# Altium PCB PekeeCarte2.PcbDoc
Units mil, origin at the board's own origin, x right, y up, seen from the top; angles counter-clockwise.
Board outline 3650.03 x 2360.03 mil, 2 copper layers (Top Layer, Bottom Layer); 6 components, 11 nets, 53 pads, 0 vias.
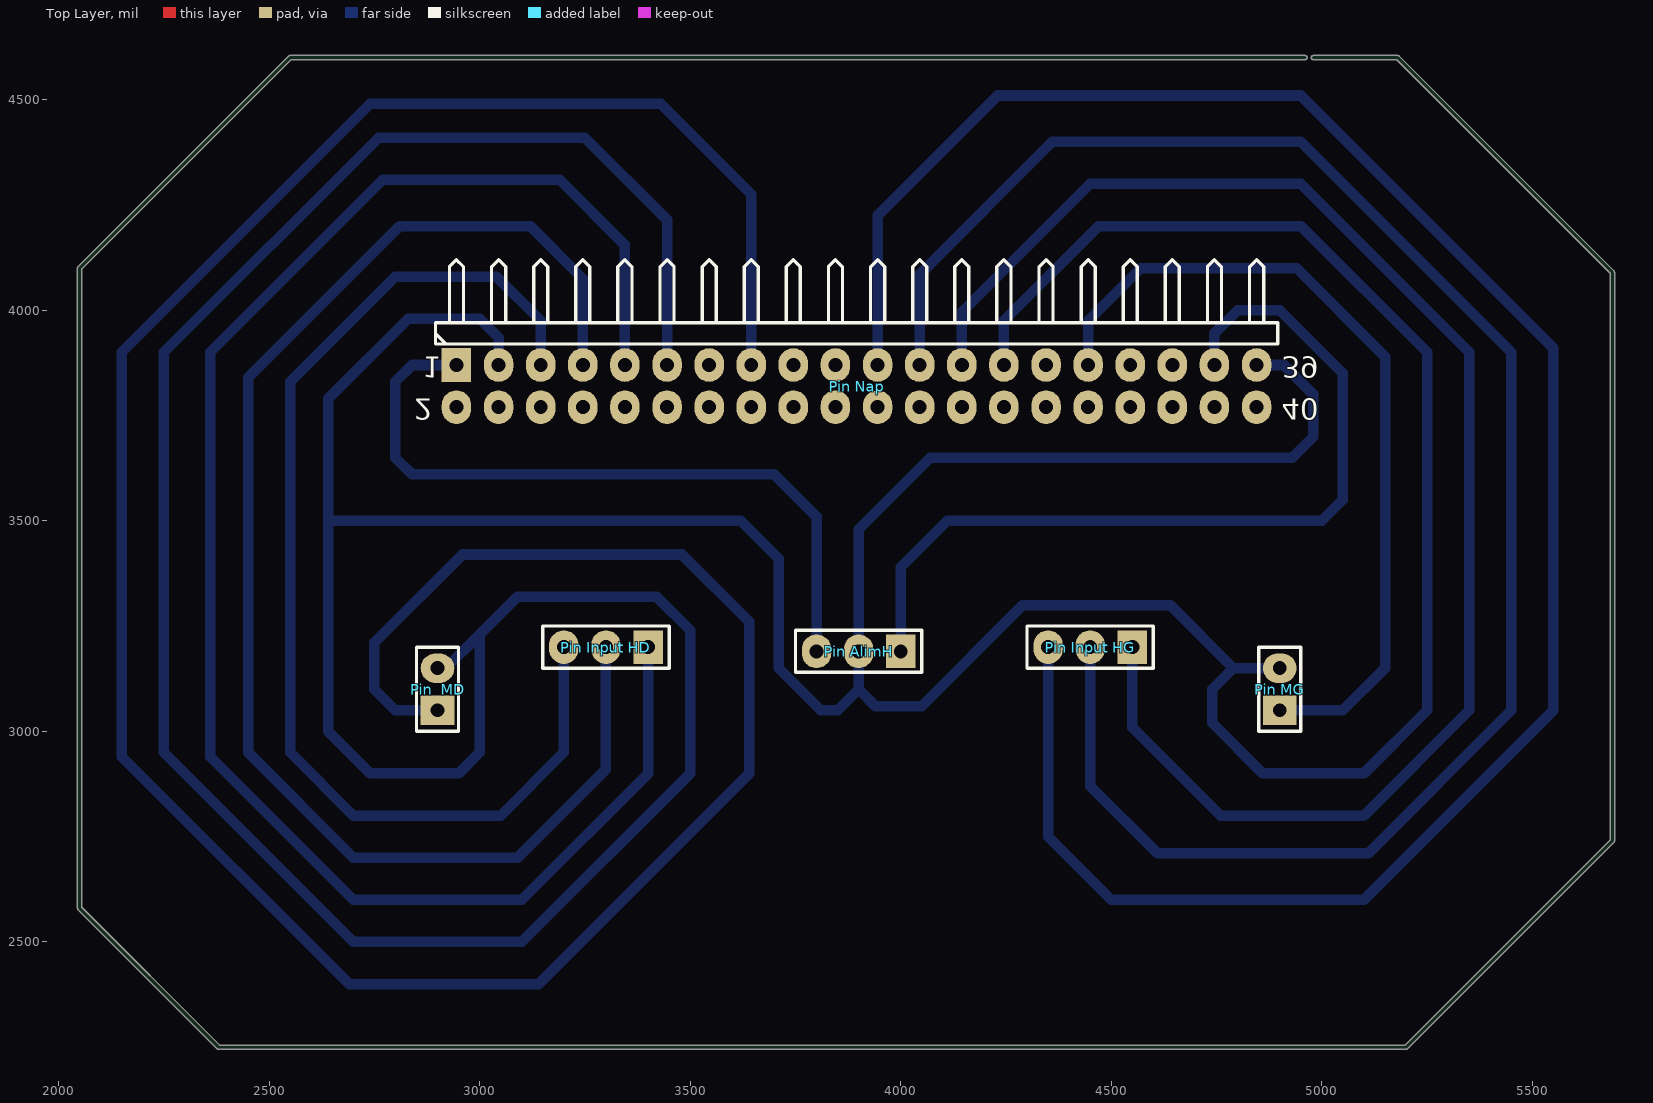
[diagram p0: Top Layer view]
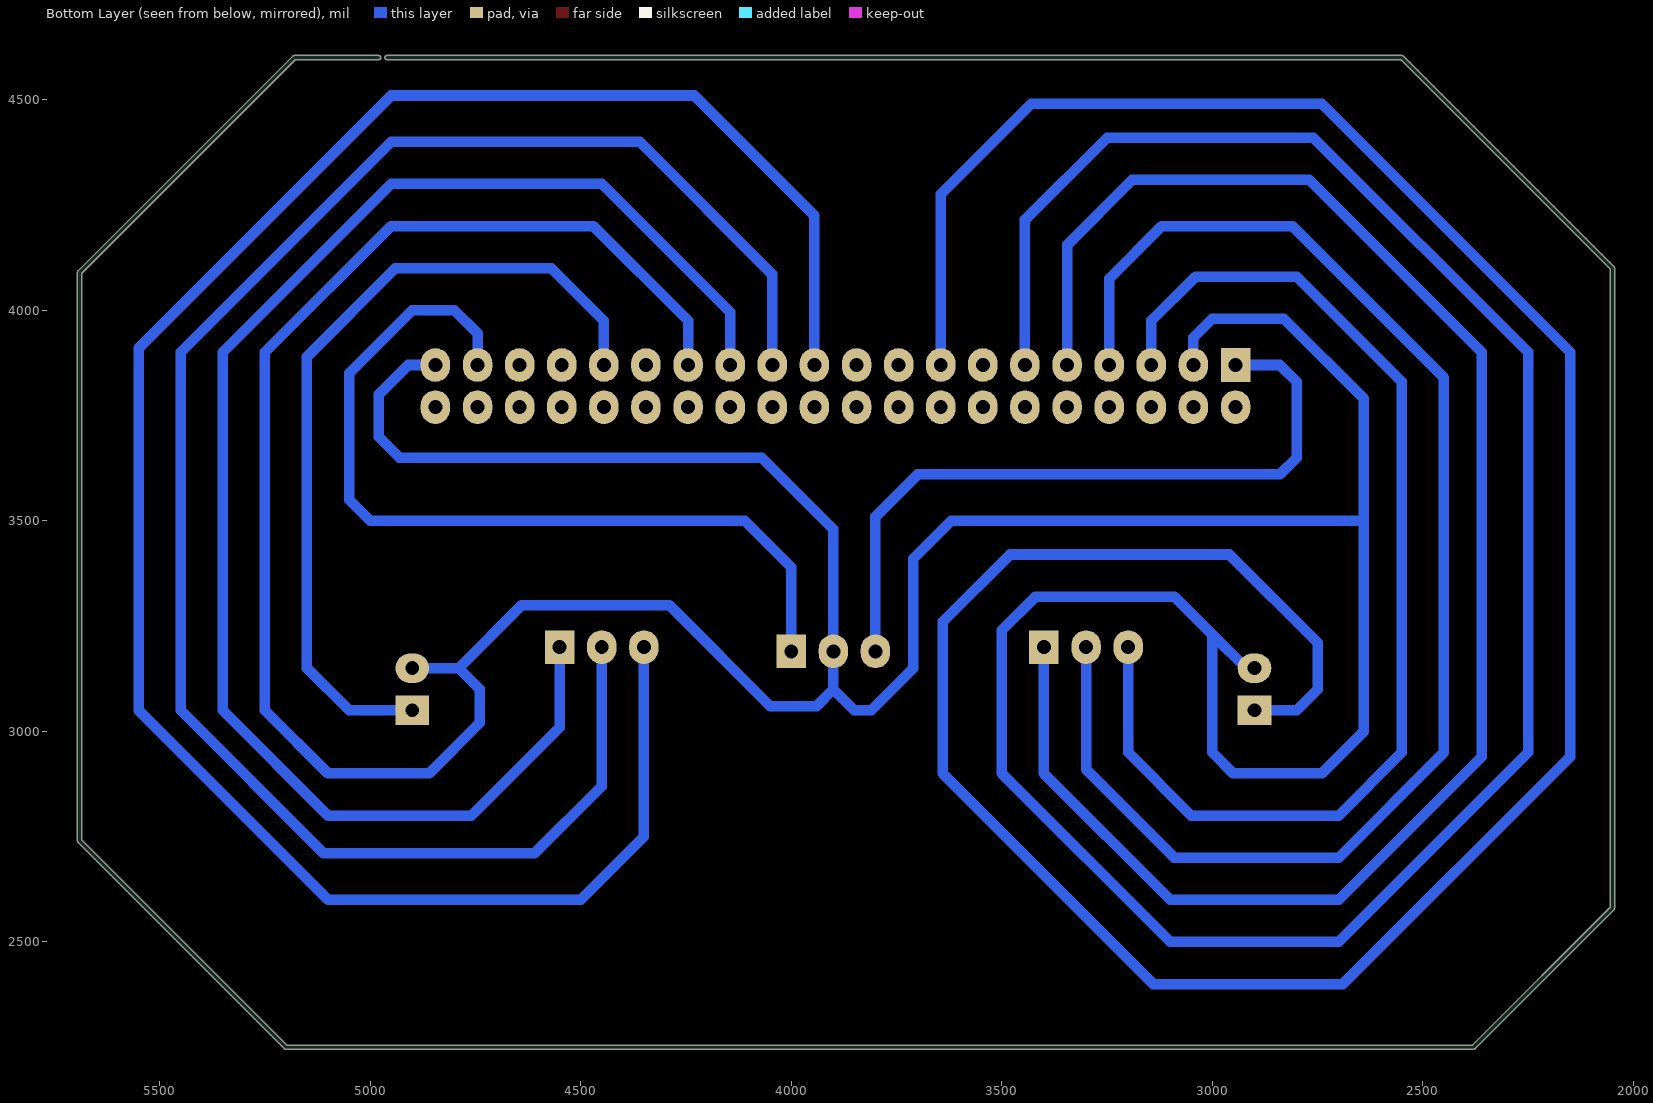
[diagram p1: Bottom Layer view, seen from below]

## Layer stack, top to bottom
Top Solder: solder mask 0.4, Solder Resist, Dk 3.5
Top Layer: signal copper 1.4
Dielectric 1: dielectric 12.6, FR-4, Dk 4.8
Bottom Layer: signal copper 1.4
Bottom Solder: solder mask 0.4, Solder Resist, Dk 3.5

## Board outline
2376.45,2246.45 2046.45,2576.45 2046.47,2576.44 cw(c2050,2580) 2044.98,2580 2044.98,4100 cw(c2050,4100) 2046.47,4103.56 2046.45,4103.55 2546.45,4603.55 2546.44,4603.53 cw(c2550,4600) 2550,4605.02 4960,4605.02 cw(c4960,4600) 4965.02,4600 cw(c4960,4600) 4960,4594.98 2552.08,4594.98 2055.01,4097.92 2055.01,2582.08 2382.08,2255.01 5197.92,2255.01 5684.98,2742.08 5684.98,4087.92 5177.92,4594.98 4980,4594.98 cw(c4980,4600) 4980,4605.02 5180,4605.02 cw(c5180,4600) 5183.56,4603.53 5183.55,4603.55 5693.55,4093.55 5693.53,4093.56 cw(c5690,4090) 5695.02,4090 5695.02,2740 cw(c5690,2740) 5693.53,2736.44 5693.55,2736.45 5203.55,2246.45 5203.56,2246.47 cw(c5200,2250) 5200,2244.99 2380,2244.99 cw(c2380,2250)

## Design rules (kind name [scope] priority, off if disabled: settings)
AssemblyTestPointUsage [All] p1 off:
AssemblyTestpoint [All] p1 off: testpointundercomponent=TRUE minsize=40 maxsize=100 preferedsize=60 minholesize=0 maxholesize=40 preferedholesize=32 testpointgrid=1 usegrid=TRUE gridtolerance=0.01 allowsidetop=TRUE allowsidebottom=TRUE
Clearance [All] p1 off: gap=10
ComponentClearance [All] p1 off: gap=10 collisioncheckmode=3 verticalgap=10 showdistances=FALSE
DiffPairsRouting [All] p1 off: maxlimit=10 minlimit=10 mostfreqgap=10 toplayer_minwidth=15 toplayer_maxwidth=15 toplayer_prefwidth=15 bottomlayer_minwidth=15 bottomlayer_maxwidth=15 bottomlayer_prefwidth=15 maxuncoupledlength=500
FabricationTestPointUsage [All] p1 off: valid=0 allowmultiple=FALSE
FabricationTestpoint [All] p1 off: side=3 testpointundercomponent=TRUE minsize=40 maxsize=100 preferedsize=60 minholesize=0 maxholesize=40 preferedholesize=32 testpointgrid=1 allowsidetop=TRUE allowsidebottom=TRUE usegrid=TRUE gridtolerance=0.01
FanoutControl Fanout_BGA [IsBGA] p1 off: bgadir=Out bgaviamode=Centered fanoutstyle=Auto fanoutdirection=Alternating viagrid=1 // Fanout_BGA (Default Rule)
FanoutControl Fanout_LCC [IsLCC] p2 off: bgadir=Out bgaviamode=Centered fanoutstyle=Auto fanoutdirection=Alternating viagrid=1 // Fanout_LCC (Default Rule)
FanoutControl Fanout_SOIC [IsSOIC] p3 off: bgadir=Out bgaviamode=Centered fanoutstyle=Auto fanoutdirection=Alternating viagrid=1 // Fanout_SOIC (Default Rule)
FanoutControl Fanout_Small [(CompPinCount < 5)] p4 off: bgadir=Out bgaviamode=Centered fanoutstyle=Auto fanoutdirection=OutThenIn viagrid=1 // Fanout_Small (Default Rule)
FanoutControl Fanout_Default [All] p5 off: bgadir=Out bgaviamode=Centered fanoutstyle=Auto fanoutdirection=Alternating viagrid=1 // Fanout_Default (Default Rule)
Height [All] p1 off: minheight=0 maxheight=1000 prefheight=500
HoleSize [All] p1 off: absolutevalues=TRUE maxlimit=100 minlimit=1 maxpercent=80.000 minpercent=20.000
HoleToHoleClearance [All] p1 off: gap=10 allowstackedmicrovias=TRUE
LayerPairs [All] p1 off: enforce=TRUE
MinimumSolderMaskSliver [All] p1 off: minsoldermaskwidth=10
NetAntennae [All] p1 off: netantennaetolerance=0
PasteMaskExpansion [All] p1 off: expansion=0
PlaneClearance [All] p1 off: clearance=20
PlaneConnect [All] p1 off: planeconnectstyle=Relief reliefexpansion=20 reliefentries=4 reliefconductorwidth=10 reliefairgap=10
PolygonConnect [All] p1 off: connectstyle=Relief reliefconductorwidth=10 reliefentries=4 polygonreliefangle="90 Angle" airgapwidth=10
RoomDefinition PekeeCarte2 [InComponentClass('PekeeCarte2')] p1: confinementstyle=ConfineIn formatcopy=TRUE lockcomponents=FALSE outline 0,0 2000,0 2000,1000 0,1000
RoutingCorners [All] p1 off: cornerstyle=45-Degree minsetback=100 maxsetback=100
RoutingLayers [All] p1 off: top layer_v5=TRUE bottom layer_v5=TRUE
RoutingPriority [All] p1 off: routingpriority=0
RoutingTopology [All] p1 off: topology=Shortest
RoutingVias [All] p1 off: holewidth=28 width=50 viastyle="Through Hole" minholewidth=28 minwidth=50 maxholewidth=28 maxwidth=50
ShortCircuit [All] p1 off: allowed=FALSE
SilkToBoardRegionClearance [All] p1 off:
SilkToSilkClearance [All] p1 off: silktosilkclearance=10
SilkToSolderMaskClearance [IsPad] p1 off: minsilkscreentomaskgap=10 clearancetoexposedcopper=TRUE
SolderMaskExpansion [All] p1 off: expansion=4
UnRoutedNet [All] p1 off:
Width [All] p1 off: maxlimit=25 minlimit=10 preferedwidth=25 toplayer_maxwidth=10 toplayer_prefwidth=10 minimp=50.000000 maximp=50.000000 favimp=50.000000

## Components (designator, comment, footprint, x,y, rotation, side; value= is the part's Value field where it differs from the comment)
"Pin  MD" "Header 2" HDR1X2 2900,3050 r90 top
"Pin AlimH" "Header 3" HDR1X3 4000,3190 r180 top
"Pin Input HD" "Header 3" HDR1X3 3400,3200 r180 top
"Pin Input HG" "Header 3" HDR1X3 4550,3200 r180 top
"Pin MG" "Header 2" HDR1X2 4900,3050 r90 top
"Pin Nap" "Header 20X2H" HDR2X20H 2945,3870 r0 top

## Footprints (in the part's own frame and the unit in brackets; to place one, negate y for a bottom-side part, rotate by r counter-clockwise, add the part's x,y. Pads: shape width x height; smd on the part's side, far side on the other; paste and mask are expansions set on the pad)
HDR1X2 [mil] "Connector; Header; 2 Position"
  rect 70x80 hole 33: 1(0,0)
  oval 70x80 hole 33: 2(100,0)
  silkscreen extent -50,-50 150,50
HDR1X3 [mil] "Connector; Header; 3 Position"
  rect 70x80 hole 33: 1(0,0)
  oval 70x80 hole 33: 2(100,0) 3(200,0)
  silkscreen extent -50,-50 250,50
HDR2X20H [mil] "Connector; Header; 20x2 Position; Right Angle"
  rect 70x80 hole 33: 1(0,0)
  oval 70x80 hole 33: 2(0,-100) 3(100,0) 4(100,-100) 5(200,0) 6(200,-100) 7(300,0) 8(300,-100) 9(400,0) 10(400,-100) 11(500,0) 12(500,-100) 13(600,0) 14(600,-100) 15(700,0) 16(700,-100) 17(800,0) 18(800,-100) 19(900,0) 20(900,-100) 21(1000,0) 22(1000,-100) 23(1100,0) 24(1100,-100) 25(1200,0) 26(1200,-100) 27(1300,0) 28(1300,-100) 29(1400,0) 30(1400,-100) 31(1500,0) 32(1500,-100) 33(1600,0) 34(1600,-100) 35(1700,0) 36(1700,-100) 37(1800,0) 38(1800,-100) 39(1900,0) 40(1900,-100)
  silkscreen extent -50,50 1950,250

## Part data
"Pin  MD" "Pin MG": "Header, 2-Pin"
"Pin AlimH" "Pin Input HD" "Pin Input HG": "Header, 3-Pin"
"Pin Nap": "Header, 20-Pin, Dual row, Right Angle"

## Nets (pads, with @x,y where several pads share a name; then routed paths per layer and width w, separated by ;. In a path a pad name is that pad's centre, name@x,y a point inside that pad or via, vN(x,y) a via of type N, cw(c..) or ccw(c..) an arc to the next point about the centre after c; other vN are vias at no path point)
+5V: "Pin AlimH.3" "Pin Nap.1" | length 1745.8
  Bottom Layer w10: 2945,3870 2945,3875 2960,3860
  Bottom Layer w25: 2945,3870 2840,3870 2800,3830 2800,3650 2840,3610 3700,3610 3800,3510 3800,3190
BD: "Pin  MD.1" "Pin Nap.15" | length 6798.2
  Bottom Layer w25: 2900,3050 2800,3050 2750,3100 2750,3210 2960,3420 3480,3420 3640,3260 3640,2900 3140,2400 2690,2400 2150,2940 2150,3900 2740,4490 3430,4490 3645,4275 3645,3870
BG: "Pin MG.1" "Pin Nap.31" | length 1980.2
  Bottom Layer w25: 4445,3870 4445,3975 4570,4100 4940,4100 5150,3890 5150,3150 5050,3050 4900,3050
EA: "Pin Input HG.1" "Pin Nap.25" | length 3652.6
  Bottom Layer w25: 4145,3870 4145,3995 4450,4300 4950,4300 5350,3900 5350,3050 5100,2800 4760,2800 4550,3010 4550,3200
EB: "Pin Input HD.1" "Pin Nap.9" | length 4069.1
  Bottom Layer w25: 3345,3870 3345,4155 3190,4310 2770,4310 2360,3900 2360,2940 2700,2600 3100,2600 3400,2900 3400,3200
GND: "Pin  MD.2" "Pin AlimH.2" "Pin MG.2" "Pin Nap.3" "Pin Nap.11" "Pin Nap.27" "Pin Nap.39" | length 15029.8
  Bottom Layer w25: 2920,3150 3000,3230 ; 3045,3870 3045,3935 3000,3980 2830,3980 2640,3790 2640,3500 ; 3445,3870 3445,4215 3250,4410 2760,4410 2250,3900 2250,2950 2700,2500 3100,2500 3500,2900 3500,3240 3420,3320 3090,3320 3000,3230 ; 4245,3870 4245,3975 4470,4200 4950,4200 5250,3900 5250,3050 5100,2900 4860,2900 4740,3020 4740,3100 4790,3150 ; 4845,3870 4910,3870 4980,3800 4980,3700 4930,3650 4070,3650 3900,3480 3900,3190 3900,3100 ; 4900,3150 4790,3150 ; 2640,3500 2640,3000 2740,2900 2950,2900 3000,2950 3000,3230 ; 2640,3500 3620,3500 3710,3410 3710,3150 3810,3050 3850,3050 3900,3100 ; 3900,3100 3940,3060 4050,3060 4290,3300 4640,3300 4790,3150
I1: "Pin Input HG.3" "Pin Nap.21" | length 5085.1
  Bottom Layer w25: 3945,3870 3945,4225 4230,4510 4950,4510 5550,3910 5550,3050 5100,2600 4500,2600 4350,2750 4350,3200
I2: "Pin Input HG.2" "Pin Nap.23" | length 4344.7
  Bottom Layer w25: 4045,3870 4045,4085 4360,4400 4950,4400 5450,3900 5450,3050 5110,2710 4610,2710 4450,2870 4450,3200
I3: "Pin Input HD.3" "Pin Nap.5" | length 2751.3
  Bottom Layer w25: 3145,3870 3145,3975 3040,4080 2800,4080 2550,3830 2550,2950 2700,2800 3050,2800 3200,2950 3200,3200
I4: "Pin Input HD.2" "Pin Nap.7" | length 3421.4
  Bottom Layer w25: 3245,3870 3245,4075 3120,4200 2810,4200 2450,3840 2450,2950 2700,2700 3090,2700 3300,2910 3300,3200
VIN: "Pin AlimH.1" "Pin Nap.37" | length 2081.2
  Bottom Layer w25: 4000,3190 4000,3390 4110,3500 5000,3500 5050,3550 5050,3850 4900,4000 4800,4000 4745,3945 4745,3870
pads on no net: "Pin Nap.2" "Pin Nap.4" "Pin Nap.6" "Pin Nap.8" "Pin Nap.10" "Pin Nap.12" "Pin Nap.13" "Pin Nap.14" "Pin Nap.16" "Pin Nap.17" "Pin Nap.18" "Pin Nap.19" "Pin Nap.20" "Pin Nap.22" "Pin Nap.24" "Pin Nap.26" "Pin Nap.28" "Pin Nap.29" "Pin Nap.30" "Pin Nap.32" "Pin Nap.33" "Pin Nap.34" "Pin Nap.35" "Pin Nap.36" "Pin Nap.38" "Pin Nap.40"

## Silkscreen, mask and mechanical layers (free items; w line width, h text height)
Mechanical 1:
  lines w10: 2050,2900 2050,3890 2050,4100 2550,4600 2750,4600 ; 2050,2910 2050,2580 2380,2250 2710,2250 ; 2700,2250 5200,2250 5690,2740 5690,3070 ; 2750,4590 2750,4600 ; 4980,4600 5180,4600 5690,4090 5690,3880 ; 4990,4600 4960,4600 2750,4600 ; 5690,3040 5690,3900

## Text inside footprints (layer, text, board x,y; h text height)
"Pin Nap": Top Overlay "40" at 4905,3790 h50 r180; Top Overlay "39" at 4905,3890 h50 r180; Top Overlay "1" at 2865,3890 h50 r180; Top Overlay "2" at 2845,3790 h50 r180